# Altium PCB 3KW-139_V1.0PCB.PcbDoc (part 3 of 3)
Units mm, origin at the board's own origin, x right, y up, seen from the top; angles counter-clockwise.
Board outline 181.22 x 106.87 mm, 2 copper layers (Top Layer, Bottom Layer); 320 components, 0 nets, 807 pads, 870 vias.
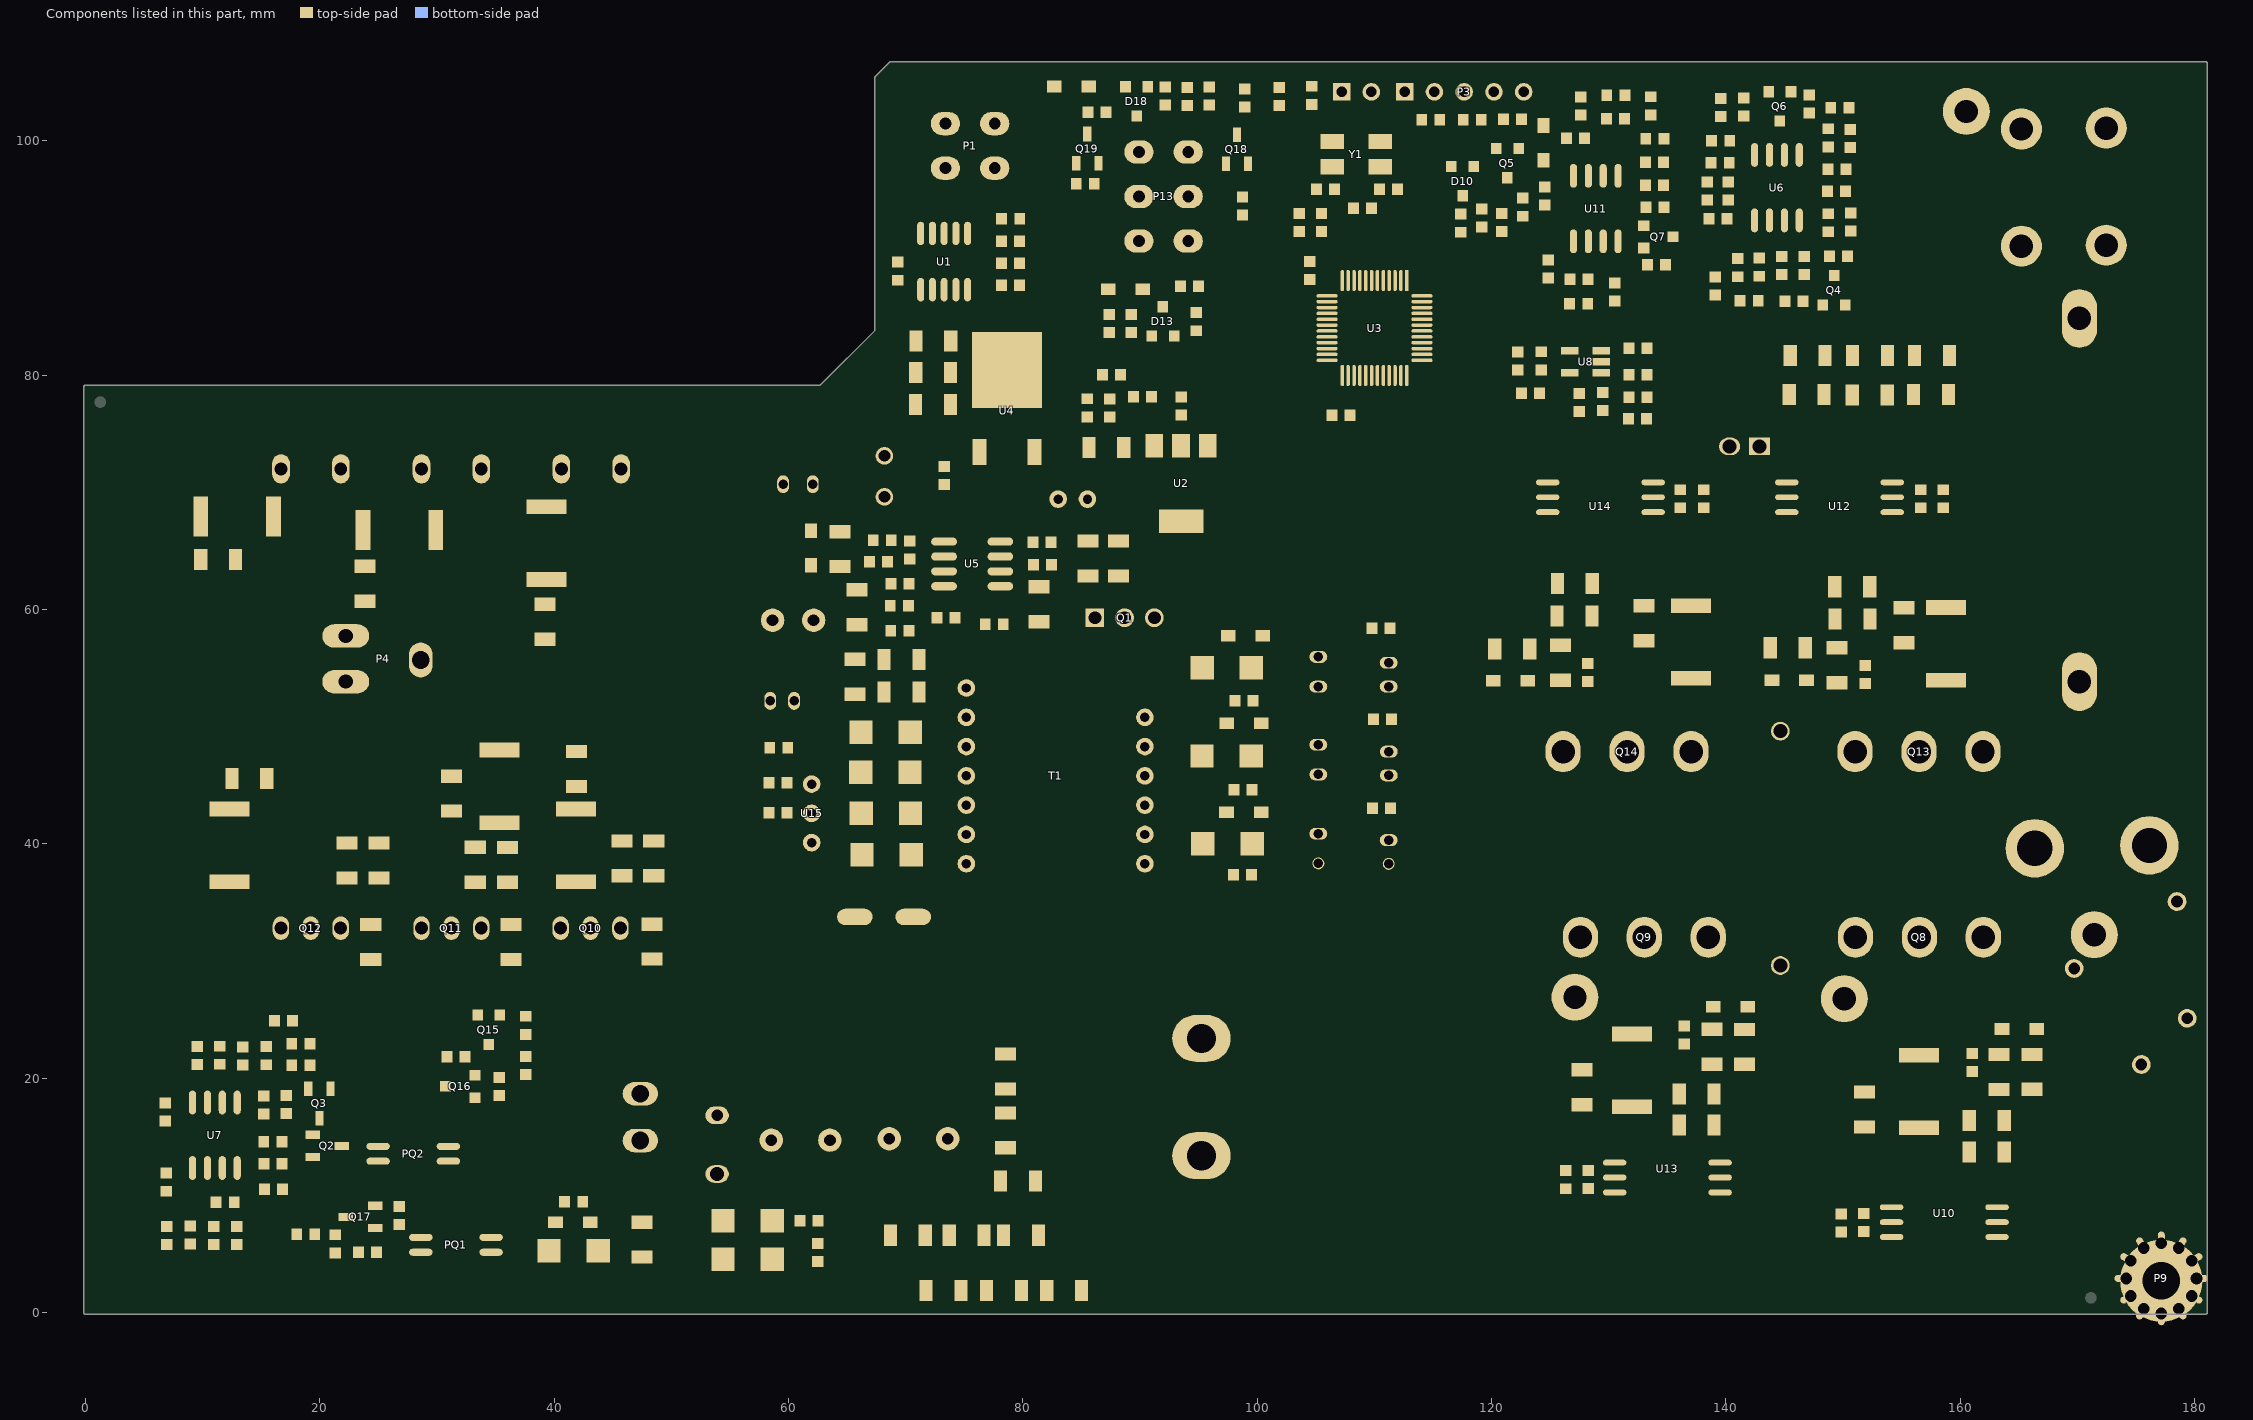
[diagram p3: the components of this part, seen from the top]

## Via types
v1: diameter 0.8, hole 0.5, Top Layer to Bottom Layer, 773 vias
v2: diameter 0.6, hole 0.4, Top Layer to Bottom Layer, 86 vias
v3: diameter 0.6, hole 0.3, Top Layer to Bottom Layer, 6 vias
v4: diameter 1.2, hole 0.8, Top Layer to Bottom Layer, 2 vias
v5: diameter 0.7/0.7 (per signal layer), hole 0.5, Top Layer to Bottom Layer, 1 vias
v6: diameter 0.7/0.8 (per signal layer), hole 0.5, Top Layer to Bottom Layer, 1 vias
v7: diameter 0.7, hole 0.4, Top Layer to Bottom Layer, 1 vias

## Nets (pads, with @x,y where several pads share a name; then routed paths per layer and width w, separated by ;. In a path a pad name is that pad's centre, name@x,y a point inside that pad or via, vN(x,y) a via of type N, cw(c..) or ccw(c..) an arc to the next point about the centre after c; other vN are vias at no path point) (continued)
copper on no net: (continued)
  Bottom Layer w0.5: v1@2.506,19.406 v1@5.237,22.137 ; v1@3.74,6.631 3.744,6.627 v1(16.538,6.627) ; v1(8.083,12.341) 8.128,12.387 8.128,22.65 v1(8.128,22.733) ; v1(8.28,24.478) 8.361,24.478 8.511,24.328 8.604,24.328 19.118,13.814 19.118,5.056 v1(19.122,5.052) ; v1(10.414,19.685) 10.497,19.685 v1(14.393,15.79) ; 16.693,32.809 16.693,27.884 19.685,24.892 30.607,24.892 ; v1(21.503,16.324) 18.862,16.324 v1(12.475,22.711) 3.175,32.011 3.175,71.651 7.936,76.412 57.757,76.412 59.543,74.625 v1@59.543,72.418 ; 58.452,52.206 58.452,58.892 58.652,59.092 v1@58.652,69.803 ; 60.484,52.206 60.291,52.013 60.291,43.805 61.489,42.607 61.99,42.607 62.406,42.607 ; 61.99,40.107 62.659,40.107 68.359,45.807 ; 61.99,45.107 64.237,47.354 64.237,62.122 67.229,65.113 90.172,65.113 v2@90.206,65.147 ; v1@63.721,75.651 68.153,75.651 68.903,76.4 v1(84.266,76.4) ; 66.2,79.497 v2(96.622,79.497) ; 68.193,73.116 60.241,73.116 v1@59.543,72.418 ; v1(71.591,94.575) 70.611,95.555 70.611,102.61 71.911,103.911 75.168,103.911 77.606,101.473 ; 75.907,62.036 70.059,62.036 ; v2@84.355,91.44 84.365,91.45 89.916,91.45 ; v2(85.5,80.804) v2@97.898,80.804 ; 89.916,95.25 91.616,96.95 98.948,96.95 v2@99.065,96.833 ; v2(93.529,85.691) 93.556,85.691 93.588,85.659 100.637,85.659 100.77,85.526 v2(100.797,85.526) ; v2@100.165,76.11 v2(113.266,76.11) ; 105.228,48.465 105.343,48.465 105.74,48.863 105.74,48.977 107.182,50.419 v1@113.284,50.419 ; 105.228,55.958 108.155,55.958 109.855,57.658 119.667,57.658 v1@125.66,63.651 ; v2(106.965,74.149) 109.421,74.149 110.372,75.101 v2(113.984,75.101) ; v1(107.505,57.721) 108.828,59.044 118.325,59.044 v1@122.615,63.334 ; 108.331,38.296 v1(108.331,41.529) ; v2(108.682,72.982) 108.697,72.967 115.01,72.967 v2(115.024,72.952) ; v2(109.081,70.221) 111.547,70.221 111.627,70.301 v2@111.73,70.198 ; 109.746,104.182 109.835,104.27 109.835,105.215 110.409,105.789 114.624,105.789 ; v2@110.942,74.047 v2(113.324,74.047) ; 111.228,55.461 138.214,55.461 ; v2@113.756,95.356 119.508,95.356 121.15,96.998 121.15,99.057 122.755,100.662 122.755,104.186 ; v2(114.985,93.003) 123.378,93.003 125.895,95.52 125.895,101.283 125.895,101.513 v2(125.895,101.709) ; 115.135,104.186 115.135,105.279 114.624,105.789 ; v2@118.141,80.356 124.45,80.356 124.466,80.372 147.109,80.372 147.852,81.115 147.852,87.59 147.867,87.605 147.867,87.676 v2(147.886,87.695) ; v2@119.015,79.322 119.046,79.322 149.764,79.322 150.736,80.294 v3(150.736,89.221) ; v2@119.053,81.619 119.071,81.637 v2(135.942,81.637) ; v2(119.446,100.452) 120.45,101.456 120.45,103.716 119.98,104.186 ; v2(120.813,78.257) 120.813,78.23 120.841,78.202 v2(120.841,75.11) ; v2@122.452,86.109 124.538,86.109 132.515,94.087 146.754,94.087 149.073,96.406 149.073,99.041 v7@146.382,101.733 ; v1@122.726,63.29 125.814,66.378 127.962,66.378 v1(142.914,66.378) 147.609,66.378 v1@147.62,66.388 ; v1(125.7,63.679) 145.173,63.679 v1@145.243,63.749 ; v2(126.309,78.21) 134.424,78.21 v2(134.439,78.195) ; v2(128.953,88.571) 143.58,88.571 145.755,90.745 152.214,90.745 153.306,91.837 v2@153.306,97.59 ; v2(129.512,95.397) 129.512,95.37 129.569,95.313 129.472,95.216 129.525,95.163 v3(129.525,93.338) ; v2(131.847,83.437) 136.728,83.437 136.801,83.511 136.874,83.438 v2@136.911,83.475 ; v1@132.052,70.434 132.116,70.498 v1(132.143,70.498) ; 132.148,75.807 132.143,75.802 v1(132.143,70.498) ; v2@132.873,90.212 135.749,93.087 v2(147.342,93.087) 150.023,93.087 ; v1(141.351,5.207) v1(141.351,13.589) ; v2(141.81,100.385) 141.81,105.645 141.954,105.789 ; 142.863,73.922 142.833,73.893 142.833,70.421 ; v2(143.071,102.872) 147.179,102.872 150.023,100.028 150.023,93.087 ; v1(144.399,4.572) 144.399,10.46 144.448,10.509 v1(144.448,10.336) ; v1(147.534,10.149) 147.563,10.12 v1(147.563,4.65) ; v2(148.343,104.099) 148.343,104.957 147.511,105.789 141.954,105.789 ; v2(151.885,93.031) 151.858,93.031 151.802,93.087 150.023,93.087 ; v1(152.43,70.421) 142.833,70.421 ; v1(165.862,2.587) 165.862,10.138 v1@165.949,10.225 ; 178.665,5.519 180.086,6.096 ; 178.893,4.781 179.157,5.072 180.086,6.096 ; 179.705,17.653 179.718,17.264 180.086,6.096 ; v1@58.652,69.803 59.543,70.695 59.769,70.92 59.769,71.758 59.724,71.802 v1@59.543,71.802 ; v1@58.652,69.803 58.652,71.324 59.13,71.802 v1@59.543,71.802 ; v1@59.543,71.802 v1@59.543,72.418 ; 68.329,61.486 v1@68.707,61.486 ; 68.329,61.486 68.329,61.579 68.791,62.041 69.626,62.041 ; 68.329,61.486 68.329,61.306 68.622,61.013 69.036,61.013 69.281,61.258 ; v1@68.688,61.468 69.491,61.468 ; v1@68.688,61.468 v1@68.707,61.486 ; v1@68.688,61.468 v1(68.688,61.224) 68.722,61.258 69.281,61.258 ; v1@68.707,61.486 69.491,61.486 ; v1@68.707,61.486 69.257,62.036 ; 69.257,62.036 69.491,61.802 69.491,61.486 ; 69.257,62.036 69.621,62.036 ; 69.281,61.258 69.491,61.468 ; 69.491,61.468 69.491,61.486 ; 69.491,61.468 69.51,61.486 ; 69.491,61.486 69.51,61.486 ; 69.51,61.486 70.059,62.036 ; 69.621,62.036 69.631,62.036 ; 69.621,62.036 69.626,62.041 ; 69.626,62.041 69.631,62.036 ; 69.631,62.036 70.059,62.036 ; 114.624,105.789 141.954,105.789 ; v1(132.143,70.498) 132.171,70.498 132.247,70.421 142.833,70.421
  Bottom Layer w0.51: 111.239,47.881 116.188,47.881 121.295,52.988 129.753,52.988 131.572,51.169 131.572,47.879 ; 144.653,49.624 145.034,50.005 145.034,55.118
  Bottom Layer w0.6: 179.718,17.264 180.091,8.509 ; 180.08,8.752 180.086,6.096
  Bottom Layer w0.8: 62.152,59.092 62.152,63.726 68.12,69.694 68.368,69.694 ; v1(66.037,49.814) v1(66.037,55.735) ; 75.184,50.807 81.944,50.807 88.706,57.57 88.706,59.291 88.692,59.305 ; 104.933,45.63 104.933,45.825 105.033,45.925 105.228,45.925 ; 106.542,38.307 106.553,38.296 ; 110.927,45.849 111.239,45.849 ; 111.218,53.418 111.228,53.429
  Bottom Layer w1: 16.703,72.009 16.703,66.101 17.399,65.405 ; 28.692,32.809 28.692,26.807 30.607,24.892 36.101,19.398 40.546,19.398 ; 28.692,72.009 28.692,66.411 27.686,65.405 17.399,65.405 ; 40.564,32.809 40.564,20.244 40.546,20.226 40.546,19.398 ; 40.622,72.009 40.622,66.149 ; 42.926,32.997 43.114,32.809 ; 47.364,18.686 48.321,18.686 50.145,16.862 53.891,16.862 53.92,16.833 61.43,16.833 63.542,14.721 68.438,14.721 68.554,14.838 68.608,14.838 ; 53.666,11.579 53.92,11.833 53.824,11.929 ; v1@66.851,58.388 v1@70.833,54.406 ; 68.359,45.807 75.184,45.807 ; 90.424,38.307 106.542,38.307 ; 90.424,43.307 102.61,43.307 104.933,45.63 ; 90.424,48.307 95.932,48.307 101.043,53.418 105.228,53.418 111.218,53.418 ; 102.55,6.096 95.25,13.396 95.25,8.349 44.936,8.349 40.546,12.739 40.546,19.398 ; 106.553,38.296 108.331,38.296 ; v2(108.488,97.875) v2(108.488,99.818) 108.488,101.465 ; 108.585,38.296 111.228,38.296 ; 113.284,14.097 126.873,14.097 131.953,19.177 131.953,20.828 132.588,21.463 ; 132.969,31.877 132.969,29.471 132.969,21.844 132.588,21.463 ; 144.653,29.624 144.653,21.59 144.78,21.463 ; 156.515,32.029 156.515,30.728 156.515,24.06 156.515,23.165 154.813,21.463 144.78,21.463 ; 161.95,47.879 161.925,47.904 161.925,53.975 160.528,55.372 138.557,55.372 137.033,53.848 137.033,47.879 137.033,41.722 135.796,40.485 135.796,40.386 123.2,40.386 ccw(c123.2,34.534) 117.348,34.534 117.348,25.936 cw(c114.808,25.936) 114.808,23.396 95.25,23.396 56.044,23.396 52.908,26.533 52.908,42.492 40.622,54.778 40.622,66.149 ; 171.45,32.258 171.802,31.906 ; 175.461,21.177 179.705,17.653 ; 177.165,2.721 177.185,2.719 ; 177.787,42.577 177.787,63 177.787,64.3 v1@177.787,85.076 ; 17.399,65.405 17.653,65.151 39.624,65.151 40.622,66.149 ; 132.588,21.463 144.78,21.463
  Bottom Layer w1.5: 169.725,29.369 170.718,31.033 170.945,31.412 170.979,31.469 171.45,32.258 ; 175.461,21.177 179.379,25.118 ; 176.149,39.878 176.955,38.238 176.976,38.196 177.532,37.065 178.507,35.08
  Bottom Layer w2: 171.371,83.651 177.053,77.969
  other v1: 3.666,6.588 165.89,10.263 94.3,11.811 95.886,11.808 96.998,12.797 93.42,13.137 96.816,14.377 93.897,14.655 96.048,14.912 40.286,18.477 40.235,20.033 33.147,21.336 94.511,21.667 96.129,21.734 93.441,22.882 97.096,23.033 157.181,23.288 155.751,24.06 93.712,24.479 157.312,24.599 96.694,24.602 132.856,25.193 95.123,25.273 150.739,25.268 149.319,25.349 126.901,25.636 155.751,25.762 127.986,25.938 157.312,26.176 125.984,26.289 151.696,26.321 131.981,26.415 148.489,26.503 133.3,26.919 128.434,26.971 155.751,27.465 125.941,27.475 132.161,27.697 151.48,27.726 157.312,27.754 148.863,27.875 127.913,27.969 133.659,28.033 126.809,28.192 150.165,28.448 132.281,29.064 155.751,29.168 151.234,29.175 157.312,29.331 133.527,29.471 149.533,29.584 132.545,30.13 150.96,30.296 157.055,30.629 133.325,30.652 138.902,30.703 155.766,30.728 161.163,30.793 127.986,30.868 137.725,30.887 162.781,30.897 149.807,30.914 171.912,30.912 132.151,30.945 152.127,30.928 170.822,30.971 126.935,30.986 128.74,31.611 172.885,31.761 126.365,31.877 149.54,31.941 170.04,31.952 128.636,32.664 139.721,32.692 157.772,32.848 172.785,32.859 126.745,32.926 170.024,32.909 137.552,33.031 155.398,33.032 132.171,33.129 150.017,33.13 161.319,33.224 152.352,33.248 162.677,33.293 169.092,33.374 133.35,33.401 138.684,33.401 127.508,33.528 151.257,33.528 156.591,33.528 172.085,33.528 171.097,33.574 150.446,34.153 168.477,34.314 169.878,34.599 151.72,34.612 171.371,34.622 149.753,34.94 150.75,35.287 167.853,35.437 169.117,35.47 170.639,35.579 152.184,35.639 149.765,36.229 151.36,36.484 166.971,36.519 169.65,36.519 168.011,36.884 177.4,37 152.494,37.272 169.076,37.542 166.732,37.561 149.639,37.664 176.228,37.828 167.52,38.007 164.995,38.044 151.707,38.091 154.391,38.198 150.75,38.296 156.023,38.406 153.168,38.465 174.605,38.527 168.201,38.607 177.792,38.649 157.315,38.942 149.974,39.446 60.4,39.6 152.071,39.59 155.33,39.603 164.277,39.698 156.464,40.044 174.127,40.227 151.003,40.335 153.723,40.359 157.661,40.391 178.138,40.381 168.313,40.407 34.003,40.635 35.032,40.635 36.061,40.635 59.75,40.9 61.05,40.9 155.267,41.052 149.974,41.21 165.111,41.298 151.77,41.43 153.187,41.651 166.878,41.656 175.148,41.669 176.911,41.783 168.073,42.008 68.2,42.2 178.7,42.2 154.448,42.344 157.598,42.376 156.023,42.439 166.97,42.854 168.33,43.192 176.75,43.5 178.05,43.5 155.802,43.856 157.346,44.14 167.855,44.2 169.237,44.26 64.3,44.8 68.2,44.8 176.1,44.8 177.4,44.8 178.7,44.8 168.752,45.341 156.811,45.558 155.582,45.621 169.931,45.701 176.75,46.1 178.05,46.1 139.157,46.412 132.076,46.435 142.291,46.423 143.944,46.423 140.756,46.455 137.653,46.487 162.419,46.484 150.359,46.51 151.671,46.497 155.82,46.51 157.132,46.497 136.341,46.521 130.767,46.579 161.131,46.627 126.679,46.712 170.79,46.738 125.405,46.761 169.252,46.969 144.722,47.233 68.2,47.4 163.34,47.394 176.1,47.4 177.4,47.4 178.7,47.4 138.505,47.485 141.664,47.719 143.36,47.73 139.806,47.741 170.251,48.156 144.452,48.324 140.616,48.605 142.247,48.638 163.212,48.683 176.75,48.7 178.05,48.7 138.266,48.775 152.246,48.795 157.707,48.795 149.828,48.818 155.289,48.818 169.188,48.93 130.468,48.937 160.84,48.946 125.144,49.081 126.924,49.081 139.449,49.102 126.111,49.403 131.699,49.403 137.033,49.403 151.003,49.403 156.464,49.403 162.052,49.403 141.08,49.653 143.284,49.702 138.617,49.92 163.012,49.921 170.145,49.971 57.8,50 59.1,50 68.2,50 136.164,50.021 142.204,50.01 176.1,50 177.4,50 178.7,50 139.795,50.301 161.167,50.465 137.537,50.539 169.188,50.981 162.103,50.996 170.379,51.228 135.991,51.285 176.75,51.3 178.05,51.3 137.623,51.706 163.028,51.762 161.091,51.856 22.987,51.943 21.209,52.07 170.622,52.225 162.465,52.485 169.201,52.481 136.046,52.549 176.1,52.6 177.4,52.6 178.7,52.6 19.685,52.705 137.234,52.765 28.956,53.467 161.476,53.463 162.656,53.559 30.226,53.721 160.2,53.835 58.45,53.9 59.75,53.9 81.85,53.9 83.15,53.9 87.05,53.9 88.35,53.9 176.75,53.9 178.05,53.9 19.431,54.102 70.883,54.381 169.052,55.082 57.8,55.2 59.1,55.2 60.4,55.2 73.4,55.2 74.7,55.2 76,55.2 77.3,55.2 78.6,55.2 79.9,55.2 81.2,55.2 82.5,55.2 83.8,55.2 89,55.2 90.3,55.2 176.1,55.2 177.4,55.2 178.7,55.2 30.226,55.245 170.434,55.499 152.725,56.265 58.45,56.5 59.75,56.5 176.75,56.5 178.05,56.5 30.226,56.642 57.8,57.8 60.4,57.8 92.9,57.8 176.1,57.8 177.4,57.8 178.7,57.8 66.741,58.402 75.35,59.1 93.55,59.1 176.75,59.1 178.05,59.1 21.082,59.182 22.352,59.182 23.876,59.182 57.8,60.4 60.4,60.4 92.9,60.4 94.2,60.4 95.5,60.4 176.1,60.4 177.4,60.4 178.7,60.4 58.45,61.7 59.75,61.7 75.35,61.7 93.55,61.7 94.85,61.7 96.15,61.7 97.45,61.7 98.75,61.7 100.05,61.7 101.35,61.7 102.65,61.7 103.95,61.7 105.25,61.7 106.55,61.7 107.85,61.7 176.75,61.7 178.05,61.7 107.186,62.691 108.329,62.691 57.8,63 59.1,63 60.4,63 76,63 92.9,63 94.2,63 95.5,63 96.8,63 98.1,63 99.4,63 100.7,63 102,63 103.3,63 104.6,63 105.9,63 176.1,63 177.4,63 178.7,63 122.639,63.258 145.306,63.837 58.45,64.3 59.75,64.3 106.55,64.3 107.85,64.3 176.75,64.3 178.05,64.3 57.8,65.6 59.1,65.6 60.4,65.6 107.2,65.6 176.1,65.6 177.4,65.6 178.7,65.6 127.962,66.38 58.45,66.9 59.75,66.9 83.15,66.9 84.45,66.9 85.75,66.9 87.05,66.9 88.35,66.9 89.65,66.9 98.75,66.9 100.05,66.9 101.35,66.9 102.65,66.9 103.95,66.9 176.75,66.9 178.05,66.9 57.8,68.2 59.1,68.2 60.4,68.2 64.3,68.2 76,68.2 77.3,68.2 78.6,68.2 79.9,68.2 81.2,68.2 82.5,68.2 83.8,68.2 100.7,68.2 102,68.2 103.3,68.2 104.6,68.2 176.1,68.2 177.4,68.2 178.7,68.2 58.45,69.5 59.75,69.5 63.65,69.5 64.95,69.5 80.55,69.5 81.85,69.5 96.15,69.5 97.45,69.5 101.35,69.5 102.65,69.5 103.95,69.5 105.25,69.5 176.75,69.5 178.05,69.5 57.8,70.8 64.3,70.8 65.6,70.8 66.9,70.8 82.5,70.8 83.8,70.8 95.5,70.8 96.8,70.8 98.1,70.8 102,70.8 103.3,70.8 104.6,70.8 176.1,70.8 177.4,70.8 178.7,70.8 58.45,72.1 59.75,72.1 61.05,72.1 63.65,72.1 64.95,72.1 66.25,72.1 67.55,72.1 68.85,72.1 70.15,72.1 71.45,72.1 77.95,72.1 83.15,72.1 84.45,72.1 87.05,72.1 90.95,72.1 96.15,72.1 97.45,72.1 101.35,72.1 102.65,72.1 103.95,72.1 105.25,72.1 176.75,72.1 178.05,72.1 57.8,73.4 59.1,73.4 60.4,73.4 61.7,73.4 63,73.4 64.3,73.4 65.6,73.4 66.9,73.4 69.5,73.4 70.8,73.4 78.6,73.4 98.1,73.4 102,73.4 103.3,73.4 104.6,73.4 176.1,73.4 177.4,73.4 178.7,73.4 58.45,74.7 59.75,74.7 61.05,74.7 62.35,74.7 68.85,74.7 77.95,74.7 79.25,74.7 97.45,74.7 101.35,74.7 102.65,74.7 103.95,74.7 105.25,74.7 176.75,74.7 178.05,74.7 89,76 95.5,76 96.8,76 98.1,76 126.7,76 128,76 129.3,76 130.6,76 176.1,76 177.4,76 178.7,76 123.698,77.216 101.35,77.3 102.65,77.3 103.95,77.3 105.25,77.3 176.75,77.3 178.05,77.3 102,78.6 103.3,78.6 104.6,78.6 105.9,78.6 176.1,78.6 177.4,78.6 178.7,78.6 175.45,79.9 176.75,79.9 178.05,79.9 68.2,81.2 173.5,81.2 174.8,81.2 176.1,81.2 177.4,81.2 178.7,81.2 172.85,82.5 174.15,82.5 175.45,82.5 176.75,82.5 178.05,82.5 170.901,83.223 169.376,83.263 118.9,83.8 161.8,83.8 163.1,83.8 164.4,83.8 165.7,83.8 167,83.8 172.2,83.8 173.5,83.8 174.8,83.8 176.1,83.8 177.4,83.8 178.7,83.8 68.85,85.1 77.95,85.1 79.25,85.1 119.55,85.1 126.05,85.1 161.15,85.1 162.45,85.1 163.75,85.1 165.05,85.1 166.35,85.1 167.65,85.1 172.85,85.1 174.15,85.1 175.45,85.1 176.75,85.1 178.05,85.1 120.2,86.4 159.2,86.4 160.5,86.4 161.8,86.4 163.1,86.4 164.4,86.4 165.7,86.4 167,86.4 168.3,86.4 172.2,86.4 173.5,86.4 174.8,86.4 176.1,86.4 177.4,86.4 178.7,86.4 169.545,86.487 170.561,86.487 84.45,87.7 122.15,87.7 123.45,87.7 159.85,87.7 161.15,87.7 162.45,87.7 163.75,87.7 165.05,87.7 166.35,87.7 167.65,87.7 168.95,87.7 171.55,87.7 172.85,87.7 174.15,87.7 175.45,87.7 176.75,87.7 178.05,87.7 122.8,89 159.2,89 160.5,89 161.8,89 163.1,89 164.4,89 167,89 168.3,89 169.6,89 170.9,89 173.5,89 174.8,89 176.1,89 177.4,89 178.7,89 71.45,90.3 159.85,90.3 161.15,90.3 162.45,90.3 167.65,90.3 168.95,90.3 170.25,90.3 175.45,90.3 176.75,90.3 178.05,90.3 69.5,91.6 124.1,91.6 125.4,91.6 159.2,91.6 160.5,91.6 161.8,91.6 163.1,91.6 168.3,91.6 169.6,91.6 174.8,91.6 176.1,91.6 177.4,91.6 68.85,92.9 88.35,92.9 92.25,92.9 96.15,92.9 87.7,94.2 96.8,94.2 68.85,95.5 103.95,95.5 141.65,95.5 142.95,95.5 152.05,95.5 87.7,96.8 118.9,96.8 135.8,96.8 142.3,96.8 68.85,98.1 92.25,98.1 103.95,98.1 136.45,98.1 141.65,98.1 159.2,98.1 160.5,98.1 161.8,98.1 163.1,98.1 164.4,98.1 165.7,98.1 167,98.1 168.3,98.1 169.6,98.1 170.9,98.1 172.2,98.1 173.5,98.1 174.8,98.1 176.1,98.1 72.1,99.4 74.7,99.4 76,99.4 78.6,99.4 135.8,99.4 137.1,99.4 159.85,99.4 161.15,99.4 162.45,99.4 163.75,99.4 167.65,99.4 168.95,99.4 170.25,99.4 174.15,99.4 175.45,99.4 176.75,99.4 68.85,100.7 75.35,100.7 87.05,100.7 88.35,100.7 92.25,100.7 93.55,100.7 94.85,100.7 136.45,100.7 152.05,100.7 168.3,100.7 169.6,100.7 174.8,100.7 176.1,100.7 83.8,102 135.8,102 167.65,102 168.95,102 170.25,102 175.45,102 68.85,103.3 97.45,103.3 135.15,103.3 136.45,103.3 152.05,103.3 163.1,103.3 164.4,103.3 165.7,103.3 167,103.3 168.3,103.3 169.6,103.3 170.9,103.3 172.2,103.3 173.5,103.3 174.8,103.3 69.5,104.6 70.8,104.6 79.9,104.6 150.1,104.6 151.4,104.6 162.45,104.6 163.75,104.6 165.05,104.6 166.35,104.6 167.65,104.6 168.95,104.6 170.25,104.6 171.55,104.6 172.85,104.6
  other v2: 108.127,71.682 119.046,79.288 116.603,87.237 97.882,87.684 80.489,89.546 107.8,91.04 81.581,91.43 106.881,92.841 123.243,96.649 153.334,97.604 119.503,98.002 122.81,98.004 90.678,103.584
  other v3: 108.262,78.09 145.209,85.054 144.525,85.077
  other v4: 78.545,23.82
  other v5: 79.25,61.7
  other v6: 76.65,61.7
  other v7: 146.357,101.725

## Polygon pours and split planes (outlines as drawn)
no net on Top Layer "T-LINE_N" (solid, remove dead copper, pour order 20): 62.273,78.977 62.617,78.977 ccw(c62.617,79.323) 62.862,79.079 67.242,83.459 ccw(c66.532,84.168) 67.536,84.169 67.536,105.33 cw(c67.8,105.33) 67.613,105.517 68.582,106.486 cw(c68.906,106.161) 68.906,106.62 150.486,106.62 cw(c151.08,103.556) 152.827,106.143 cw(c151.171,104.515) 153.493,104.495 153.493,86.446 cw(c151.782,86.367) 153.048,85.212 cw(c151.727,86.547) 151.717,84.669 138.329,84.669 ccw(c138.329,83.274) 137.342,84.261 ccw(c138.97,82.632) 136.668,82.632 136.668,76.349 cw(c135.963,76.349) 136.461,75.851 136.31,75.7 cw(c134.514,77.496) 134.514,74.956 118.263,74.956 ccw(c118.263,72.417) 116.467,74.212 110.39,68.135 ccw(c112.186,66.339) 109.646,66.339 109.646,62.962 cw(c107.674,62.962) 109.068,61.567 108.705,61.204 cw(c106.909,63) 106.909,60.46 97.461,60.46 ccw(c97.461,57.921) 95.665,59.716 89.789,53.84 cw(c87.993,55.636) 87.993,53.096 73.635,53.096 ccw(c73.635,50.556) 71.839,52.352 71.283,51.796 ccw(c71.549,51.53) 71.173,51.53 71.173,47.125 ccw(c71.874,47.125) 71.378,46.63 71.674,46.334 ccw(c71.993,46.652) 71.993,46.202 75.921,46.202 cw(c75.921,45.816) 76.194,46.089 76.204,46.079 cw(c75.855,45.729) 76.349,45.729 76.349,45.478 cw(c75.855,45.478) 76.204,45.128 cw(c75.964,45.368) 75.964,45.028 72.6,45.028 ccw(c72.6,43.019) 71.179,44.44 ccw(c71.888,43.731) 70.886,43.731 70.886,41.61 cw(c70.359,41.61) 70.731,41.237 cw(c69.826,42.142) 69.826,40.862 66.331,40.862 cw(c66.331,41.691) 65.745,41.105 ccw(c65.266,40.626) 65.266,41.303 64.777,41.303 ccw(c64.777,39.646) 63.605,40.818 ccw(c64.351,40.072) 63.297,40.072 63.297,39.846 cw(c62.393,39.846) 63.032,39.207 cw(c62.552,39.687) 62.552,39.009 60.914,39.009 cw(c60.914,40.82) 59.633,39.539 57.605,41.568 cw(c58.617,42.58) 57.185,42.58 57.185,77.437 cw(c58.736,77.437) 57.639,78.533 57.858,78.751 cw(c58.454,78.155) 58.454,78.998
no net on Top Layer "Top Layer-LINE_N" (solid, remove dead copper, pour order 4): 173.891,40.79 175.312,43.661 175.374,78.253 171.504,82.122 161.675,82.122 158.552,85.245 158.552,91.959 159.601,93.041 177.287,93.096 179.444,90.939 179.426,42.267 179.197,38.862 178.369,37.848 177.224,37.019 176.09,37.048 174.717,37.365 173.679,38.403 173.498,39.997
no net on Top Layer "Polygon_IL" (solid, remove dead copper, pour order 0): 158.974,105.408 157.988,104.422 157.988,98.044 159.09,96.942 176.698,96.942 177.673,97.917 177.673,101.219 173.484,105.408
no net on Bottom Layer "T-LINE_N" (solid, remove dead copper, pour order 22): 62.273,78.977 62.617,78.977 ccw(c62.617,79.323) 62.862,79.079 67.242,83.459 ccw(c66.532,84.168) 67.536,84.169 67.536,105.33 cw(c67.8,105.33) 67.613,105.517 68.582,106.486 cw(c68.906,106.162) 68.906,106.62 150.486,106.62 cw(c150.486,104.492) 151.991,105.996 cw(c150.491,104.496) 152.613,104.495 152.613,86.163 cw(c151.172,86.163) 152.191,85.143 cw(c151.047,86.287) 151.047,84.669 138.329,84.669 ccw(c138.329,83.274) 137.342,84.261 ccw(c138.97,82.632) 136.668,82.632 136.668,76.349 cw(c135.963,76.349) 136.461,75.851 136.31,75.7 cw(c124.114,90.808) 122.055,71.501 116.167,71.501 ccw(c115.828,66.499) 112.53,70.276 110.39,68.135 ccw(c112.185,66.34) 109.646,66.339 109.646,62.962 cw(c107.675,62.962) 109.068,61.567 108.705,61.204 cw(c106.909,63) 106.909,60.46 97.461,60.46 ccw(c97.461,57.921) 95.665,59.716 89.789,53.84 cw(c87.993,55.635) 87.993,53.096 73.635,53.096 ccw(c73.635,50.557) 71.839,52.352 ccw(c73.149,50.876) 71.179,50.991 71.179,47.355 ccw(c72.468,47.754) 71.839,46.56 75.337,46.56 cw(c75.348,45.592) 76.026,46.283 76.059,46.224 cw(c75.188,45.782) 76.116,45.478 cw(c75.35,45.794) 75.666,45.028 72.6,45.028 ccw(c72.6,43.02) 71.179,44.44 ccw(c71.887,43.732) 70.886,43.731 70.886,41.61 cw(c70.36,41.609) 70.731,41.237 cw(c69.826,42.142) 69.826,40.862 66.331,40.862 cw(c66.331,41.69) 65.745,41.105 ccw(c65.267,40.627) 65.266,41.303 64.777,41.303 ccw(c64.777,39.647) 63.605,40.818 ccw(c64.35,40.072) 63.297,40.072 63.297,39.846 cw(c62.394,39.846) 63.032,39.207 cw(c62.553,39.686) 62.552,39.009 60.914,39.009 cw(c60.914,40.82) 59.633,39.539 57.605,41.568 cw(c58.617,42.58) 57.185,42.58 57.185,77.437 cw(c58.736,77.437) 57.639,78.533 57.858,78.751 cw(c58.454,78.156) 58.454,78.998
no net on Bottom Layer "Polygon_IL" (solid, remove dead copper, pour order 16): 158.974,105.408 157.988,104.422 157.988,98.044 159.09,96.942 176.698,96.942 177.673,97.917 177.673,101.219 173.484,105.408
no net on Bottom Solder (solid): 13.97,30.309 ccw(c15.704,30.309) 14.478,29.083 18.997,24.564 ccw(c19.431,24.997) 19.431,24.384 22.851,24.384 cw(c22.851,22.217) 24.384,23.749 25.164,22.969 ccw(c26.96,24.765) 26.96,22.225 40.101,22.225 ccw(c39.6,23.554) 40.894,22.969 40.894,33.116 ccw(c39.594,33.116) 40.513,34.036 ccw(c40.207,33.73) 40.206,34.163 38.453,34.163 ccw(c38.71,33.737) 38.227,33.856 38.227,29.464 37.861,29.098 cw(c37.211,29.748) 37.211,28.829 29.517,28.829 cw(c29.517,29.262) 29.21,28.956 29.21,33.729 ccw(c28.662,33.453) 28.854,34.036 27.343,34.036 ccw(c27.664,33.132) 26.797,33.543 26.797,30.099 cw(c25.571,30.099) 26.438,29.232 26.289,29.083 cw(c25.983,29.389) 25.982,28.956 19.34,28.956 cw(c19.34,31.496) 17.544,29.7 17.399,29.845 cw(c18.012,30.458) 17.145,30.458 17.145,33.677 ccw(c16.279,33.677) 16.891,34.29 ccw(c16.585,33.984) 16.584,34.417 14.63,34.417 ccw(c14.858,33.391) 13.97,33.953

## Keep-outs
Keep-Out Layer:
  circle w0.254: c177.701,103.637 r1.6
  circle w0.254: c177.267,2.98 r1.6
  circle w0.4: c175.867,14.48 r3
  circle w0.4: c7.485,56.936 r3
  circle w0.4: c52.705,56.936 r3
  circle w0.4: c115.875,66.226 r3
  circle w0.254: c3.267,2.98 r1.6
  lines w0.254: 0.041,79.01 62.752,79.01 67.508,83.766 67.508,85.915 67.508,105.403 68.722,106.616 ; 180.959,0 0,0 0,79.01 0,106.616 68.722,106.616 ; 180.968,0.034 180.968,106.616 68.722,106.616
  lines w0.5: 6.96,71.927 9.677,74.645 51.616,74.645 52.86,73.401 ; 55.118,42.926 62.738,35.306 ; 142.593,76.955 142.632,76.955 145.277,74.31 161.013,74.31 165.172,70.151

## Other copper
Top Layer:
  rectangle: 73.258,76.559 81.958,83.815
  region: 173.948,39.876 178.016,38.395 179.427,42.27 175.358,43.751
  rectangle: 175.319,42.267 179.426,86.592
  region: 166.416,38.209 171.324,45.218 168.961,46.872 164.053,39.863
  region: 171.323,45.216 171.323,55.463 168.529,55.463 168.529,45.216
  region: 164.135,39.179 170.02,30.775 173.178,32.986 167.293,41.391
  rectangle: 149.531,47.278 152.435,54.08
  rectangle: 123.317,53.396 128.709,54.356
  rectangle: 124.628,47.371 127.508,53.871
  rectangle: 137.16,24.251 139.7,32.385
  rectangle: 33.655,39.624 36.576,41.529
  region: 133.686,23.149 ccw(c133.599,23.236) 133.722,23.236 133.722,25.783 cw(c134.755,25.885) 133.952,26.543 134.108,26.807 ccw(c133.193,27.763) 134.516,27.734 134.516,33.183 ccw(c133.715,33.184) 134.281,33.75 ccw(c133.876,33.346) 133.876,33.918 132.028,33.918 ccw(c132.028,33.422) 131.677,33.772 131.557,33.652 ccw(c131.804,33.404) 131.454,33.404 131.454,25.277 cw(c130.763,25.277) 131.251,24.789 131.211,24.749 cw(c130.885,25.075) 130.885,24.613 130.206,24.613 ccw(c130.206,24.559) 130.168,24.597 ccw(c130.398,24.367) 130.072,24.367 130.072,23.291 ccw(c130.341,23.291) 130.151,23.1 130.168,23.083 133.61,23.083 ccw(c133.61,23.151) 133.658,23.103
  region: 163.517,22.784 163.517,32.369 ccw(c161.568,32.369) 162.946,33.748 ccw(c162.191,32.996) 162.193,34.062 161.652,34.062 ccw(c161.709,33.128) 161.008,33.748 ccw(c161.757,32.733) 160.51,32.92 160.51,22.784
  region: 158.073,21.616 158.073,33.248 ccw(c157.111,33.248) 157.791,33.929 ccw(c157.565,33.702) 157.565,34.023 155.48,34.023 ccw(c155.502,33.419) 154.985,33.733 154.954,33.615 154.954,21.616
  region: 148.717,29.315 cw(c147.85,29.315) 148.463,28.702 148.318,28.557 ccw(c150.114,26.761) 147.574,26.761 147.574,25.781 ccw(c149.107,25.781) 148.023,24.697 148.209,24.511 ccw(c149.742,26.044) 149.742,23.876 150.495,23.876 ccw(c150.495,25.409) 151.579,24.325 151.765,24.511 ccw(c150.232,26.044) 152.4,26.044 152.4,29 cw(c153.986,29.246) 152.691,30.194 152.86,31.402 ccw(c151.29,31.402) 152.4,32.512 ccw(c151.48,31.592) 151.48,32.893 149.33,32.893 ccw(c149.33,32.026) 148.717,32.639
  region: 135.382,54.737 135.382,46.355 ccw(c135.763,46.355) 135.763,45.974 144.907,45.974 ccw(c144.939,46.387) 145.351,46.355 145.351,49.806 ccw(c144.252,49.7) 144.145,50.8 140.208,50.8 cw(c140.415,52.431) 138.811,52.07 138.811,54.737
  region: 157.099,54.61 157.099,52.959 ccw(c157.226,52.959) 157.226,52.832 159.362,52.832 cw(c159.362,51.793) 160.401,51.793 160.401,46.609 ccw(c161.036,46.609) 161.036,45.974 163.068,45.974 ccw(c163.068,46.609) 163.703,46.609 163.703,53.553 ccw(c162.646,53.553) 162.646,54.61
  region: 149.352,29.718 cw(c149.352,30.353) 148.717,30.353 148.717,41.529 cw(c149.733,41.529) 149.733,42.545 153.162,42.545 ccw(c152.971,44.259) 154.686,44.45 154.686,49.911 cw(c155.321,49.911) 155.321,50.546 157.861,50.546 cw(c157.861,50.165) 158.242,50.165 158.242,42.926 158.242,38.481 cw(c156.972,38.608) 156.845,37.338 154.94,37.338 ccw(c154.94,35.306) 152.908,35.306 152.908,30.468 cw(c152.007,30.619) 151.856,29.718
  region: 127.127,24.765 127.127,24.679 cw(c126.599,26.817) 124.46,26.289 124.46,41.783 cw(c125.476,41.783) 125.476,42.799 128.905,42.799 ccw(c128.905,43.942) 130.048,43.942 130.048,49.022 cw(c130.937,49.022) 130.937,49.911 132.334,49.911 cw(c132.334,49.022) 133.223,49.022 133.223,38.227 cw(c132.207,38.227) 132.207,37.211 130.175,37.211 ccw(c130.175,36.068) 129.032,36.068 129.032,26.584 cw(c127.17,26.627)
  region: 157.734,25.273
  region: 158.242,26.035
  region: 156.21,25.146
  region: 176.597,77.023 171.451,82.17 161.689,82.17 158.514,85.345 158.514,91.981 159.613,93.08 171.988,93.08 174.897,90.171 178.58,90.171 179.443,89.308 179.427,77.023
  region: 139.7,23.622
  region: 94.869,38.354
  region: 27.686,53.181 28.67,52.197 44.323,52.197 47.371,55.245 47.371,72.898 46.99,73.279 44.323,73.279 43.942,72.898 43.942,59.055 42.151,57.264 28.164,57.264 27.686,56.786
  region: 20.701,56.642 20.066,57.277 20.066,59.309 22.298,61.541 30.638,61.541 32.131,63.034 32.131,72.771 32.512,73.152 35.179,73.152 35.56,72.771 35.56,60.833 33.501,58.774 26.135,58.774 25.019,57.658 24.003,56.642
  region: 13.335,64.442 13.335,52.705 15.113,50.927 23.47,50.927 24.511,51.968 24.511,54.289 23.936,54.864 18.669,54.864 17.653,55.88 17.653,59.817 20.701,62.865 21.463,63.627 21.463,69.215 23.114,70.866 23.114,72.898 22.733,73.279 20.701,73.279 20.32,72.898 20.32,71.12 18.415,69.215 18.415,65.405 17.452,64.442
Bottom Layer:
  rectangle: 174.995,42.096 179.413,86.579
  region: 173.895,39.876 178.054,38.363 179.413,42.096 175.254,43.61
  region: 172.253,45.216 172.253,55.463 168.17,55.463 168.17,45.216
  region: 167.04,37.772 172.254,45.218 169.138,47.401 163.924,39.954
  region: 164.055,39.313 169.94,30.909 173.098,33.12 167.213,41.524
  region: 34.377,26.416 35.365,25.428 40.574,30.637 39.586,31.625
  region: 28.702,30.647 27.714,29.659 32.923,24.45 33.911,25.438
  region: 28.615,30.226 27.627,31.214 22.418,26.005 23.406,25.017
  region: 19.304,26.503 20.292,27.491 15.083,32.7 14.095,31.712
  region: 140.653,16.955 133.541,24.067 118.491,9.017 125.603,1.905
  rectangle: 95.123,1.905 125.603,15.367
  region: 161.017,30.784 cw(c161.017,30.727) 161.058,30.767 161.487,30.338 ccw(c161.622,30.473) 161.622,30.282 162.157,30.282 ccw(c162.157,31.379) 162.933,30.603 163.226,30.896 ccw(c162.667,31.454) 163.457,31.454 163.457,32.618 ccw(c162.398,32.618) 163.147,33.367 162.843,33.671 ccw(c162.593,33.421) 162.593,33.774 161.352,33.774 ccw(c161.352,33.505) 161.161,33.696 160.634,33.168 ccw(c161.231,32.572) 160.387,32.572 160.387,31.811 ccw(c161.884,31.811) 160.826,30.752 cw(c160.903,30.675) 160.903,30.784
  region: 138.331,30.335 ccw(c138.366,30.37) 138.366,30.32 138.785,30.32 ccw(c138.785,31.267) 139.454,30.598 139.639,30.782 ccw(c138.817,31.604) 139.979,31.604 139.979,32.825 ccw(c139.581,32.825) 139.863,33.107 139.775,33.195 ccw(c138.331,31.75) 138.331,33.793 ccw(c138.331,32.666) 137.534,33.463 137.163,33.093 ccw(c137.621,32.635) 136.974,32.635 136.974,31.742 ccw(c138.468,31.742) 137.412,30.685 137.421,30.675 ccw(c138.243,31.497) 138.243,30.335
  pour cut-out: 110.428,93.253 ccw(c110.428,93.679) 110.854,93.679 110.854,96.307 cw(c111.139,96.307) 111.139,96.591 111.725,96.591 ccw(c111.725,96.84) 111.973,96.84 111.973,100.746 ccw(c111.654,100.746) 111.653,101.066 105.119,101.066 ccw(c105.119,100.799) 104.853,100.799 104.853,96.769 ccw(c105.048,96.769) 105.048,96.573 105.936,96.573 cw(c105.936,96.413) 106.096,96.413 106.096,93.679 ccw(c106.476,93.679) 106.476,93.298
  region: 172.252,55.458 172.093,55.617 ccw(c170.297,53.821) 170.297,56.361 170.122,56.361 ccw(c170.122,53.821) 168.326,55.617 168.171,55.461 ccw(c168.269,55.56) 168.269,55.421 170.584,55.421 cw(c170.584,53.64) 171.842,54.899
  region: 148.727,29.291 cw(c147.86,29.291) 148.473,28.677 148.328,28.532 ccw(c150.124,26.736) 147.584,26.736 147.584,25.756 ccw(c149.117,25.756) 148.033,24.672 148.219,24.486 ccw(c149.752,26.02) 149.752,23.851 150.505,23.851 ccw(c150.505,25.385) 151.589,24.3 151.775,24.486 ccw(c150.242,26.02) 152.41,26.02 152.41,28.976 cw(c153.979,28.976) 152.869,30.085 152.869,31.378 ccw(c151.3,31.378) 152.41,32.487 ccw(c151.49,31.568) 151.49,32.868 149.34,32.868 ccw(c149.34,32.001) 148.727,32.614
  region: 149.352,29.718 cw(c149.352,30.353) 148.717,30.353 148.717,38.862 cw(c151.892,39.37) 151.384,42.545 153.162,42.545 ccw(c152.971,44.259) 154.686,44.45 154.686,49.911 cw(c155.321,49.911) 155.321,50.546 157.861,50.546 cw(c157.861,50.165) 158.242,50.165 158.242,42.926 158.242,40.64 cw(c155.131,40.449) 155.321,37.338 154.94,37.338 ccw(c154.94,35.306) 152.908,35.306 152.908,30.353 cw(c152.273,30.353) 152.273,29.718
  region: 122.936,1.905 135.255,1.905 ccw(c135.255,4.318) 137.668,4.318 137.668,14.478 cw(c139.827,14.478) 139.827,16.637 143.383,16.637 ccw(c143.383,19.177) 145.923,19.177 145.923,20.193 ccw(c144.653,20.193) 144.653,21.463 131.958,21.463 cw(c131.958,21.976) 131.445,21.976
  region: 128.778,33.909 cw(c128.778,33.528) 129.159,33.528 129.159,24.638 cw(c128.27,24.638) 128.27,23.749 125.095,23.749 cw(c125.095,24.384) 124.46,24.384 124.46,32.512 cw(c125.857,32.512) 125.857,33.909
  region: 146.304,44.196 146.304,48.895 146.304,52.07 cw(c147.193,52.07) 147.193,52.959 159.512,52.959 cw(c159.512,52.07) 160.401,52.07 160.401,46.609 ccw(c161.036,46.609) 161.036,45.974 162.941,45.974 ccw(c162.941,46.736) 163.703,46.736 163.703,57.404 ccw(c162.052,57.404) 162.052,59.055 136.779,59.055 ccw(c136.779,57.531) 135.255,57.531 135.255,44.45 cw(c133.604,44.45) 133.604,42.799 123.291,42.799 ccw(c123.919,35.214) 118.369,40.423 ccw(c118.307,40.494) 118.382,40.436 ccw(c129.509,25.834) 115.746,37.984 ccw(c123.389,31.838) 113.913,34.365 cw(c111.064,36.001) 110.49,32.766 91.44,32.766 ccw(c91.439,31.243) 89.916,31.242 89.916,21.971 ccw(c90.551,21.971) 90.551,21.336 118.11,21.336 ccw(c118.11,23.876) 120.65,23.876 120.523,31.242 cw(c126.492,31.242) 126.492,37.211 137.795,37.211 ccw(c138.557,44.958)
  region: 131.445,21.59 131.381,16.51 156.21,16.51 ccw(c156.21,18.415) 158.115,18.415 158.115,33.401 ccw(c157.417,33.338) 157.353,34.036 155.702,34.036 ccw(c155.638,33.338) 154.94,33.401 154.94,24.174 cw(c152.618,24.357) 152.433,22.034 148.376,22.034 cw(c148.282,24.266) 146.05,24.174 146.05,30.48 ccw(c145.415,30.48) 145.415,31.115 143.891,31.115 ccw(c143.891,30.48) 143.256,30.48 143.256,28.956 cw(c140.717,28.955) 140.716,26.416 137.04,26.416 cw(c136.857,28.78) 134.493,28.597 134.493,33.274 ccw(c133.858,33.274) 133.858,33.909 132.08,33.909 ccw(c132.079,33.275) 131.445,33.274 131.445,22.606 131.445,22.363
  region: 98.179,21.324 54.182,21.324 48.688,26.819 48.688,34.778 35.143,48.322 35.143,60.498 30.63,65.012 45.265,65.012 45.986,64.29 45.986,50.455 57.359,39.083 63.677,32.765 94.609,32.765 98.179,29.195
  region: 13.597,29.272 18.983,23.885 22.984,23.885 25.225,21.644 25.225,4.656 27.977,1.904 107.03,1.904 107.03,14.991 106.66,15.361 81.043,15.361 79.738,14.056 74.281,8.599 45.002,8.599 40.486,13.116 40.486,29.272
  region: 27.583,56.793 27.583,52.935 28.5,52.018 31.165,52.022 32.131,52.988 32.131,56.769 31.179,57.721 28.511,57.721
  region: 23.657,54.89 19.076,54.89 18.545,54.359 18.549,51.308 18.93,50.927 23.749,50.927 24.248,51.426 24.248,54.3
  region: 20.793,56.706 23.974,56.706 25.528,58.26 25.526,59.945 24.892,60.579 21.082,60.579 20.066,59.563 20.066,57.433
  region: 20.79,56.613
  region: 176.597,77.023 171.451,82.17 162.305,82.17 158.514,85.961 158.514,91.981 159.613,93.08 177.303,93.08 179.447,90.936 179.412,77.023
  region: 45.974,62.484 15.621,62.484 14.859,63.246 14.859,73.279 15.178,73.598 17.207,73.598 17.526,73.279 17.526,69.723 18.415,68.834 26.035,68.834 26.924,69.723 26.924,73.279 27.18,73.535 29.462,73.535 29.718,73.279 29.718,69.85 30.861,68.707 37.846,68.707 38.862,69.723 38.862,73.279 39.118,73.535 41.4,73.535 41.656,73.279 41.656,70.104 43.18,68.58 45.974,65.786 45.974,62.865
  region: 17.352,29.259 17.352,35.259 18.288,36.195 25.781,36.195 26.543,35.433 26.543,28.448 29.425,28.448 29.425,35.521 30.099,36.195 37.592,36.195 38.049,35.738 38.049,28.702 40.735,28.702 40.735,37.321 36.4,41.656 15.629,41.656 13.6,39.628 13.6,29.259

## Silkscreen, mask and mechanical layers (free items; w line width, h text height)
Top Overlay:
  lines w0.5: 12.12,4.708 13.99,4.708 15.111,3.586 ; 57.036,7.179 57.036,5.63 57.404,5.262 ; 73.947,33.755 89.1,33.755 84.229,38.626 84.229,49.666 ; 101.5,60.075 108.526,60.075 109.724,61.273 ; 148.111,94.809 153.663,94.809 156.021,92.45
  text "3KW-INV-V2.0" at 111.856,3.693 h0.8
  text "2025-10-07" at 112.214,2.027 h0.8
Top Solder:
  drawing of 49 lines, arcs and shapes, not listed
Bottom Solder:
  drawing of 13 lines, arcs and shapes, not listed

## Text inside footprints (layer, text, board x,y; h text height)
E1: Top Overlay "+" at 105.609,54.688 h0.8
E2: Top Overlay "+" at 112.498,54.699 h0.8
E5: Top Overlay "+" at 105.609,47.195 h0.8
E6: Top Overlay "+" at 112.509,47.119 h0.8
E10: Top Overlay "+" at 105.609,39.601 h0.8
E11: Top Overlay "+" at 112.498,39.566 h0.8
E13: Top Overlay "+" at 60.813,70.314 h0.8 r270
E14: Top Overlay "+" at 64.893,68.066 h0.8 r90
E16: Top Overlay "+" at 59.214,53.476 h0.8 r90
Q8: Bottom Overlay "S" at 151.435,29.87 h0.8 r180; Bottom Overlay "D" at 156.896,29.819 h0.8 r180; Bottom Overlay "G" at 162.433,29.768 h0.8 r180
Q9: Bottom Overlay "S" at 127.965,29.87 h0.8 r180; Bottom Overlay "D" at 133.426,29.819 h0.8 r180; Bottom Overlay "G" at 138.963,29.768 h0.8 r180
Q13: Bottom Overlay "S" at 161.569,50.038 h0.8; Bottom Overlay "D" at 156.108,50.089 h0.8; Bottom Overlay "G" at 150.571,50.14 h0.8
Q14: Bottom Overlay "S" at 136.652,50.038 h0.8; Bottom Overlay "D" at 131.191,50.089 h0.8; Bottom Overlay "G" at 125.654,50.14 h0.8